# Altium PCB CAN Logger 3d HP3561 PCB.PcbDoc (part 3 of 3)
Units mil, origin at the board's own origin, x right, y up, seen from the top; angles counter-clockwise.
Board outline 2229 x 3254 mil, 4 copper layers (Component Side, Signal Layer 2, Signal Layer 1, Solder Side), stack 33.234 mil thick; 117 components, 131 nets, 581 pads, 372 vias.
Unrouted connection lines stored in the file: 2.
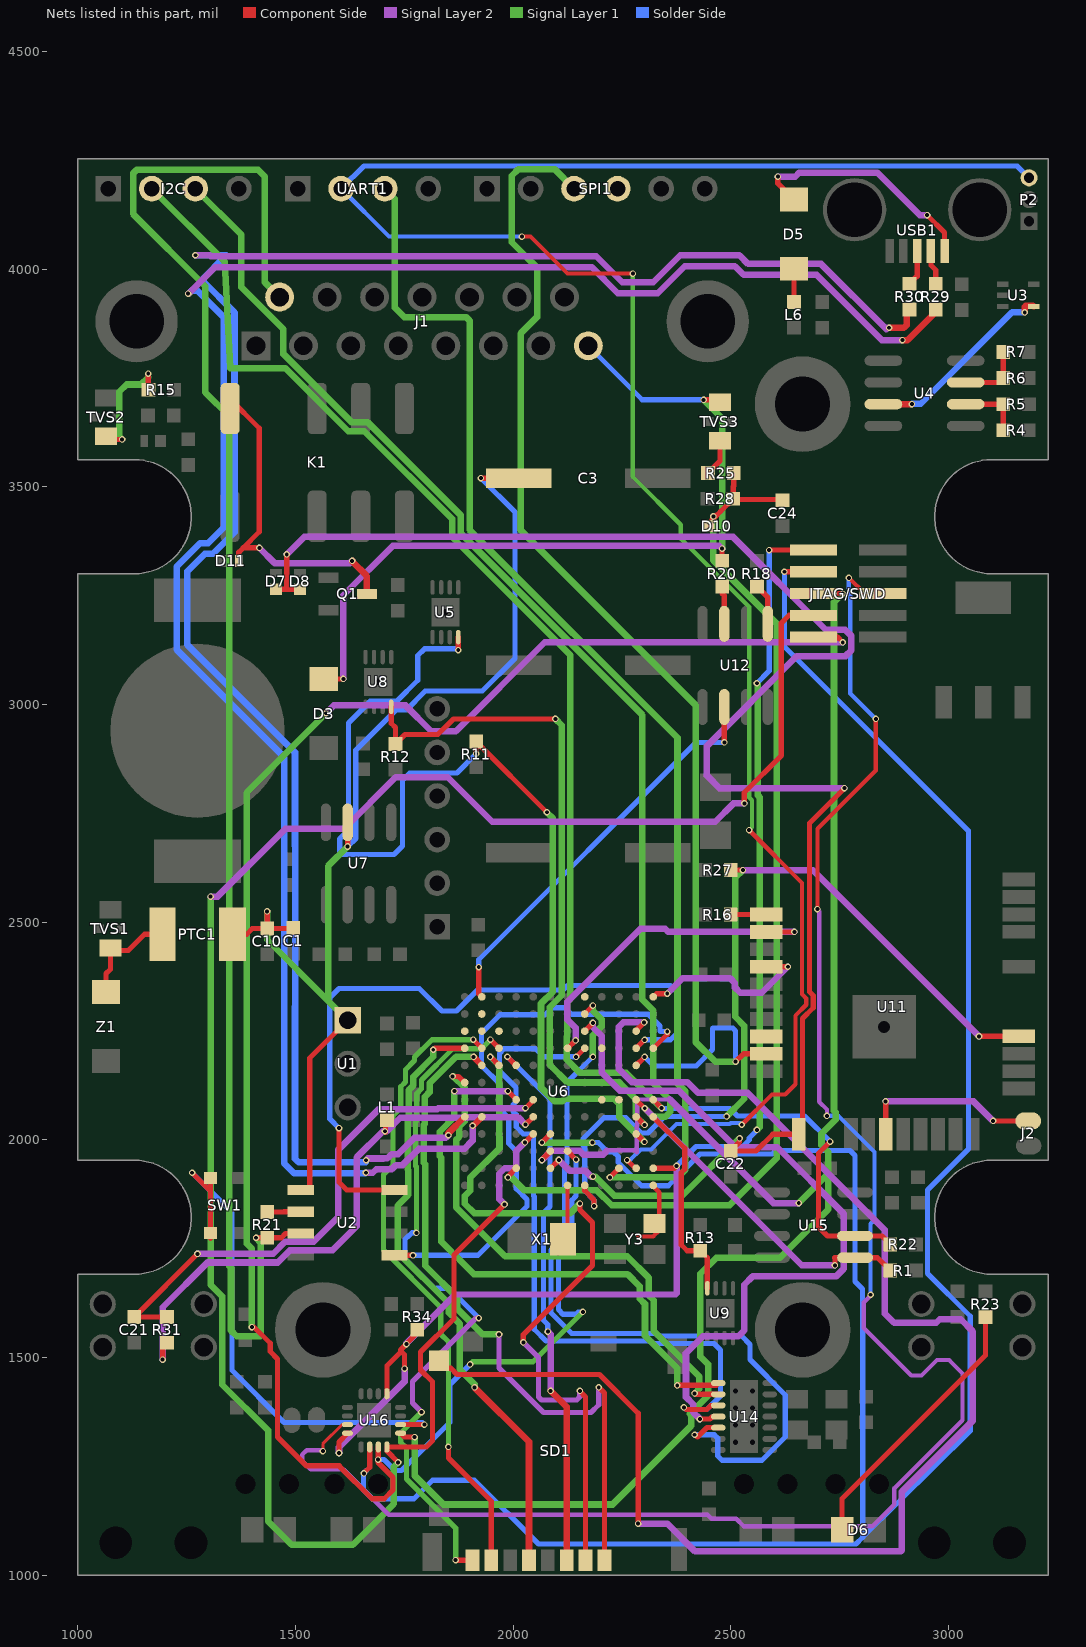
[diagram p5: the nets of this part, all layers, seen from the top]

## Via types
v1: diameter 15, hole 9, Component Side to Solder Side, 290 vias
v2: diameter 20, hole 10, Component Side to Solder Side, 66 vias
v3: diameter 20, hole 13, Component Side to Solder Side, 12 vias
v4: diameter 50, hole 28, Component Side to Solder Side, 4 vias

## Nets (pads, with @x,y where several pads share a name; then routed paths per layer and width w, separated by ;. In a path a pad name is that pad's centre, name@x,y a point inside that pad or via, vN(x,y) a via of type N, cw(c..) or ccw(c..) an arc to the next point about the centre after c; other vN are vias at no path point) (continued)
NetD5_1: D5.1 USB1.1 | length 553.8
  Component Side w12: v1(2608,4212.5) 2608,4197 D5.1@2645,4160 ; v1(2951,4124.01) 2990.98,4084.02 USB1.1@2990.98,4042
  Signal Layer 2 w15: v1(2608,4212.5) 2648,4212.5 2657.32,4221.82 2836.4,4221.82 2934.22,4124.01 v1(2951,4124.01)
NetD5_2: D5.2 L6.1 | length 76.5
  Component Side w12: L6.1@2645,3924.53 D5.2@2645,4001
NetD6_2: D6.2 R23.1 | length 624.9
  Component Side w12: D6.2@2755.6,1105 2755.6,1176 3085,1505.4 R23.1@3085,1593.47
NetD11_1: D11.1 K1.8 Q1.3 | length 797
  Component Side w12: K1.8@1350,3680 1350,3701.56 1417,3634.56 1417,3397 1380,3360 ; D11.1@1370,3330 1370,3350 1380,3360 ; v1(1417,3360) 1380,3360
  Component Side w15: v1(1630,3330) 1630,3329.44 1664.29,3295.15 Q1.3@1664.29,3254.1
  Signal Layer 2 w15: v1(1417,3360) 1452,3325 1625,3325 v1(1630,3330)
NetJ2_2: J2.2 U11.23 | length 422.2
  Component Side w12: v1(2855.38,2088.62) 2855.84,2088.16 U11.23@2855.84,2012.91 ; v1(3102.3,2043.7) J2.2@3183.03,2043.7
  Signal Layer 2 w15: v1(2855.38,2088.62) 3057.38,2088.62 v1(3102.3,2043.7)
NetJTAG/SWD_5: JTAG/SWD.5 U16.3 | length 4243.7
  Component Side w7: v1(1563,1285.25) 1563,1302.1 1607.09,1346.18 U16.3@1619.45,1346.18
  Component Side w10: v1(2699,2530) 2699,2714.74 2833,2848.74 v1(2833,2967) ; v1(2771,3291) 2771.52,3291 2807.52,3255 JTAG/SWD.5@2849.06,3255
  Signal Layer 2 w10: v1(1563,1285.25) 1560.75,1287.5 1525.75,1287.5 1515.5,1277.25 1515.5,1262.75 1534.75,1243.5 1609.83,1243.5 1714.33,1139 2446.47,1139 2455.47,1130 2512.57,1130 2530.07,1112.5 2825,1112.5 2875.5,1163 2875.5,1199.75 3032.14,1356.39 3032.14,1463.7 3001.3,1494.54 2973.54,1494.54 2938,1459 2914.5,1459 2805.5,1568 2805.5,1626.6 2820.85,1641.96 v1(2820.85,1644.5) ; v1(2699,2530) 2703.32,2525.68 2703.32,2087.38 2720.85,2069.85 v1(2720.85,2055.28)
  Solder Side w10: v1(2720.85,2055.28) 2747.04,2055.28 2830.07,1972.25 2830.07,1816.94 2820.85,1807.73 v1(2820.85,1644.5) ; v1(2771,3291) 2771,3265.75 2774.5,3262.25 2774.5,3025.5 v1(2833,2967)
NetPTC1_1: PTC1.1 TVS1.2 Z1.2 | length 234.7
  Component Side w12: Z1.2@1065,2340 1065,2382 1075,2392 1075,2435 1116,2435 1153.5,2472.5 PTC1.1@1195,2472.5
NetR4_2: R4.2 R5.1 U4.6 | length 146.7
  Component Side w12: U4.6@3039.49,3690 R5.1@3125.95,3690 3125.95,3659.47 3125.47,3659 R4.2@3125.47,3630
NetR6_1: R6.1 R7.1 U4.7 | length 150.1
  Component Side w12: U4.7@3039.49,3740 3115.47,3740 R6.1@3125.47,3750 R7.1@3125.47,3810
NetR15_1: R15.1 TVS2.2 | length 267.1
  Component Side w12: TVS2.2@1065,3610 1066,3609 v1(1102,3609) ; v1(1161.93,3760) 1161.93,3723.55 R15.1@1162.47,3723
  Signal Layer 1 w15: v1(1102,3609) 1095.5,3615.5 1095.5,3718.28 1112.36,3735.14 1145.14,3735.14 1162,3752
NetR16_1: R16.1 U11.10 | length 81.5
  Component Side w12: R16.1@2499.53,2517.79 U11.10@2581.04,2517.79
NetR18_2: R18.2 U12.1 | length 95.9
  Component Side w12: R18.2@2560,3270.97 2585,3245.97 U12.1@2585,3185.47
NetR20_2: R20.2 U12.3 | length 87.6
  Component Side w12: R20.2@2480,3270.97 2480,3254.81 2485,3249.81 U12.3@2485,3185.47
NetR21_1: R21.1 U2.6 | length 77.3
  Component Side w12: R21.1@1435,1834.53 1473,1834.53 1473.47,1835 U2.6@1512.13,1835
NetR25_1: R25.1 TVS3.2 | length 79.5
  Component Side w12: R25.1@2447.55,3531.85 2475,3559.3 TVS3.2@2475,3600
NetR29_2: R29.2 USB1.2 | length 80
  Component Side w12: USB1.2@2959.49,4042 2959.49,4009.06 2970.55,3998 R29.2@2970.55,3966.58
NetR30_2: R30.2 USB1.3 | length 82.6
  Component Side w12: R30.2@2910.55,3966.58 2927.99,3984.02 USB1.3@2927.99,4042
NetSPI1_4: SPI1.4 U11.17
NetU3_4: U3.4 U4.3 | length 446.6
  Component Side w15: U4.3@2850.51,3690 v1(2916,3690) ; v1(3175,3900.98) 3175,3913.82 3177.09,3915.91 3193.93,3915.91 U3.4@3195.43,3914.41
  Solder Side w15: v1(2916,3690) 2917,3691 2936,3691 3145.98,3900.98 v1(3175,3900.98)
NetU6_A8: U6.A8
NetU6_B2: U6.B2
NetU6_C1: U6.C1
NetU6_C2: U6.C2
NetU6_C3: U6.C3
NetU6_D9: U6.D9
NetU6_G9: U6.G9
NetU6_G10: U6.G10
nINT0: U6.F1 U14.9 | length 1238.5
  Component Side w12: v1(1861,2146) 1874.63,2146 U6.F1@1888.78,2131.85 ; v1(2417,1418) 2419.13,1415.87 U14.9@2471.26,1415.87
  Signal Layer 1 w15: v1(1861,2146) 1863.28,2146 1889,2120.28 1889,2043.37 1876,2030.37 1876,2006.99 1869,1999.99 1869,1845.43 1981.43,1733 2262,1733 2311,1684 2311,1643.53 2322.88,1631.65 2322.88,1561.12 2428,1456 2428,1429 v1(2417,1418)
nINT1: U6.G4 U14.8 | length 1367
  Component Side w12: v1(1988,2112) U6.G4@2006.14,2093.86 ; v1(2376.99,1436.5) 2424.66,1436.5 ; 2424.68,1436.48 2466.28,1436.48 U14.8@2471.26,1441.46
  Signal Layer 2 w15: v1(1865,2112) v1(1988,2112)
  Signal Layer 1 w15: v1(1865,2112) 1865,2052.56 1831.5,2019.06 1831.5,1963.15 1835,1959.65 1835,1766.72 1909.72,1692 2262.5,1692 2291,1663.5 2291,1635.25 2302.88,1623.37 2302.88,1550.14 2376.99,1476.03 v1(2376.99,1436.5)
OSC16: U6.M12 Y3.3 | length 163.2
  Component Side w10: 2287.16,1778.34 2321.49,1778.34 2335.67,1792.52 2335.67,1879.72 2321.85,1893.54 U6.M12@2321.85,1895.63
Program: SW1.1 SW1.2 U16.10 | length 1270.9
  Component Side w12: v1(1262.5,1924.61) 1305,1882.11 1305,1837 ; SW1.1@1305,1774.02 1305,1837 ; SW1.2@1305,1900 1305,1837 ; U16.10@1741.5,1346.18 v1(1796,1346.18)
  Solder Side w12: v1(1262.5,1924.61) 1354,1833.11 1354,1471 1474,1351 1791.18,1351 v1(1796,1346.18)
PTA0: JTAG/SWD.4 U6.J5 U16.8 | length 4874.3
  Component Side w12: v1(1736,1259.25) 1710,1285.25 U16.8@1710,1295 1800.5,1295 1814.5,1309 1814.5,1444.78 1787.45,1471.83 1787.45,1512.86 1864,1589.42 1864,1736.03 v1(1980.13,1852.16) ; v1(2027,1994.48) U6.J5@2046.26,2013.74 ; v1(2531,2773) 2531,2798 2616,2883 2616,3187.5 2633.5,3205 JTAG/SWD.4@2690,3205
  Signal Layer 2 w15: v1(1305,2559) 1321,2559 1477,2715 1612,2715 1730,2833 1850,2833 1952,2731 2464,2731 2506,2773 v1(2531,2773) ; v1(1980.13,1852.16) 1968,1864.28 1968,1922.28 1980.72,1935 2006,1935 2007,1936 2007,1974.48 v1(2027,1994.48)
  Signal Layer 1 w15: v1(1305,2559) 1305,1667.61 1332,1640.61 1332,1438 1437,1333 1437,1124 1491,1070 1632,1070 1726,1164 1726,1249.25 v1(1736,1259.25)
PTA1: JTAG/SWD.8 U6.J6 U16.6 | length 5713.9
  Component Side w12: v1(1657,1234) 1657,1234.74 1670.63,1248.37 U16.6@1670.63,1295 ; v1(2066,1994.11) U6.J6@2085.63,2013.74 ; v1(2623,3305) JTAG/SWD.8@2690,3305
  Signal Layer 1 w15: v1(2066,1994.11) 2181.89,1994.11 v1(2182,1994)
  Solder Side w12: 1662.5,1240.13 1656,1233.63 1656,1195.92 1675.92,1176 1772.46,1176 1814.96,1218.5 1911.5,1218.5 2058,1072 2787.5,1072 2803.09,1087.41 3050,1331.5 3050,1595 2952,1693 2952,1885 3046,1979 3046,2710 2623,3133 v1(2623,3305) ; v1(2182,1994) 2195.52,1994 2217.02,1972.5 2230.66,1972.5 2241.5,1961.66 2241.5,1948.02 2294.52,1895 2356.39,1895 2429.39,1968 2595.08,1968 2602.58,1975.5 2773.66,1975.5 2785,1964.16 2785,1675.19 2802.35,1657.84 2802.35,1621.81 2803,1621.16 2803,1087.5
PTA2: JTAG/SWD.6 U6.K6 U16.9 | length 4057.2
  Component Side w12: U16.9@1741.5,1326.5 1750.39,1317.6 v1(1773.5,1317.6) ; v1(2066,1953.63) 2066,1954.74 U6.K6@2085.63,1974.37 ; JTAG/SWD.6@2690,3255 v1(2757,3255)
  Signal Layer 2 w10: 2215.84,1976.35 2216.09,1976.61 2279.94,1976.61 2283.33,1980 ; 2283.6,1971.72 2284.88,2090.03 2282.48,2092.48 2360,2093
  Signal Layer 2 w15: v1(2066,1953.63) 2087.05,1974.68 2152.97,1974.68 2161.54,1966.11 2206.57,1966.11 2215.14,1974.68 ; 2360,2093 2598,1855 v1(2656,1855)
  Signal Layer 1 w15: v1(1773.5,1317.6) 1773.5,1229.22 1839.98,1162.74 2228.45,1162.74 2408.78,1343.06 2408.78,1367.38 2405.44,1370.72 2448,1413.28 2448,1484.5 2430,1502.5 2430,1692.68 2466.32,1729 2612.5,1729 2724,1840.5 2724,1923 ; v1(2656,1855) 2724,1923 ; v1(2757,3255) 2737,3235 2737,2067.42 2740.85,2063.57 2740.85,2047 2708.25,2014.39 2708.25,1987.96 2724,1972.21 2724,1923
PTA3: JTAG/SWD.2 U6.K7 U16.7 | length 4725.7
  Component Side w12: v1(1400,1570) 1405,1570 1442,1533 1442,1513.88 1459.03,1496.85 1459.03,1317.81 1525.34,1251.5 1600.42,1251.5 1675.92,1176 1704.08,1176 1724,1195.92 1724,1225 1690,1259 v1(1690,1266) ; v1@1690.31,1264.5 U16.7@1690.31,1295 ; U6.K7@2125,1974.37 v1(2144.69,1954.68) ; JTAG/SWD.2@2690,3155 2745,3155 v1(2757,3143)
  Signal Layer 2 w15: v1(1570,2980) 1588,2998 1753,2998 1812,2939 1868.5,2939 2072.5,3143 v1(2757,3143)
  Signal Layer 1 w12: v1(1901,1484.5) 1907,1490.5 2045.5,1490.5 v1(2160,1605)
  Signal Layer 1 w15: v1(1400,1570) 1400,1750 1388,1762 1388,2798 v1(1570,2980)
  Solder Side w12: v1(1690,1266) 1703.09,1266 1728.34,1240.75 1743.66,1240.75 1854.71,1351.8 1854.71,1438.21 v1(1901,1484.5) ; v1(2144.69,1954.68) 2144.69,1871.49 2134.85,1861.66 2134.85,1770.81 2104,1739.96 2104,1610.34 2114.84,1599.5 2144.5,1599.5 2149.43,1604.43 2159.43,1604.43 v1(2160,1605)
RAW: D3.1 J1.8 R20.1 TVS3.1 | length 1898.4
  Component Side w12: D3.1@1565,3059 v1(1610,3059) ; v1(2437.5,3700) TVS3.1@2475,3700 ; R20.1@2480,3330.03 v1(2480,3358.27)
  Signal Layer 2 w15: v1(1610,3059) 1610,3251 1724,3365 2473.27,3365 v1(2480,3358.27)
  Signal Layer 1 w15: v1(2437.5,3700) 2480,3657.5 v1(2480,3358.27)
  Solder Side w12: J1.8@2172.6,3824.09 2296.69,3700 v1(2437.5,3700)
RAW_Measured: C24.2 D10.2 R25.2 R28.1 U6.L4 | length 2526.7
  Component Side w12: v1@1990.28,1918.39 U6.L4@2006.89,1935 ; D10.2@2449.53,3410 2456.92,3424 2476.92,3444 ; v1(2460,3432) 2464.92,3432 2476.92,3444 ; R25.2@2506.6,3531.85 2506.6,3502.15 2505.45,3501 R28.1@2505.45,3472.53 ; C24.2@2618.79,3469.05 2617.06,3470.79 2507.19,3470.79 R28.1@2505.45,3472.53 ; 2476.92,3444 R28.1@2505.45,3472.53
  Signal Layer 1 w15: v1(1988,1914) 1996,1914 2026,1884 2192.28,1884 2226.28,1850 2497,1850 2605,1958 2605,3186 2460,3331 v1(2460,3432)
RAW_Sense: U6.A2 U12.6 | length 940.5
  Component Side w12: v1(1921,2396.96) 1921,2335.85 U6.A2@1928.15,2328.7 ; v1(2485,2913) U12.6@2485,2994.53
  Solder Side w12: v1(1921,2396.96) 1921,2414 2420,2913 v1(2485,2913)
RESET_B: JTAG/SWD.10 R34.2 U6.L12 U16.4 U16.13 | length 3220.7
  Component Side w12: v1(1600,1281) 1600,1306.5 1620,1326.5 U16.4@1619.45,1326.5 ; U16.13@1710,1417.05 1710,1481.29 1741.21,1512.5 1741.21,1515.95 1750.57,1506.58 v1(1750.57,1475) ; 1741.21,1517.21 v1(1755,1531) 1755,1531.81 1779.75,1556.56 R34.2@1779.75,1564 ; U6.L12@2321.85,1935 2370.23,1935 v1(2375.6,1940.37) ; v1(2588,3355) JTAG/SWD.10@2690,3355
  Signal Layer 2 w15: v1(1600,1281) 1600,1294.51 1750.57,1445.08 v1(1750.57,1475) ; v1(1755,1531) 1755,1533 1866.5,1644.5 2373,1645.5 2375.6,1648.1 v1(2375.6,1940.37)
  Signal Layer 1 w15: v1(2560,2023) 2566,2029 2566,2787.5 2562.08,2791.42 2562.08,3046.92 v1(2560,3049)
  Solder Side w12: v1(2375.6,1940.37) 2420.23,1985 2527.66,1985 2542.46,1999.79 2542.46,2004.64 2560,2022.19 v1(2560,2023) ; v1(2560,3049) 2588,3077 v1(2588,3355)
RX1: P2.3 U6.L11 UART1.2 | length 4896.8
  Component Side w10: v1(2020,4075) 2040,4075 2125,3990 v1(2275,3990) ; v1(2262,1953.68) 2262,1953.39 2280.39,1935 U6.L11@2282.48,1935 ; v1(2525,2035) 2594.53,2104.53 2625.14,2104.53 2648.5,2127.89 2648.5,2285.59 2673.34,2310.43 2673.34,2324.93 2663.32,2334.95 2663.32,2590.26 v1(2542.08,2711.5)
  Signal Layer 1 w10: v1(2275,3990) 2275,3523 2385,3413 2385,3381.25 2542.08,3224.17 2542.08,2786.67 2548.5,2780.25 2548.5,2717.92 v1(2542.08,2711.5)
  Solder Side w10: UART1.2@1605,4185 1715,4075 v1(2020,4075) ; v1(2262,1953.68) 2268.68,1953.68 2292.99,1977.99 2316.85,1977.99 2375.37,2036.5 2497.5,2036.5 2500,2039 2521,2039 v1(2525,2035)
  Solder Side w12: UART1.2@1605,4185 1657.32,4237.32 3157.68,4237.32 P2.3@3185,4210
"Safe 12V": C1.2 C3.1 C10.1 PTC1.2 U1.1 U2.5 U7.7 | length 2602.3
  Component Side w12: PTC1.2@1355,2472.5 1388,2472.5 1400.95,2485.45 C10.1@1435,2485.45 ; v1(1435,2525) C10.1@1435,2485.45 ; C1.2@1495,2486.6 1493.85,2485.45 C10.1@1435,2485.45 ; U2.5@1512.13,1885 1533,1885 1533,2188 U1.1@1620,2275 ; v1(1620,2674) U7.7@1620,2729.49 ; v1(1926,3520) C3.1@2013.15,3520
  Signal Layer 1 w15: v1(1435,2525) 1435,2460 1575,2320 ; U1.1@1620,2275 1575,2320 ; v1(1620,2674) 1575,2629 1575,2320
  Solder Side w12: v1(1620,2674) 1638.75,2692.75 1638.75,2895.6 1730.93,2987.78 1754.78,2987.78 1798,3031 1929,3031 2004,3106 2004,3442 v1(1926,3520)
SCK: U6.D8 U14.10 | length 1638.1
  Component Side w12: v1(2144.78,2191) U6.D8@2164.37,2210.59 ; v1(2392.36,1385.93) 2397.44,1380.85 2444.85,1380.85 2454.28,1390.28 U14.10@2471.26,1390.28
  Solder Side w12: v1(2144.78,2191) 2070,2191 2051.39,2209.61 1979.34,2209.61 1968.5,2198.77 1968.5,2158.5 2006.5,2120.5 2006.5,2087.66 1999.5,2080.66 1999.5,2065.34 2007,2057.84 2007,2030.34 2023.34,2014 2045.75,2014 2046.75,2013 2046.75,1872.1 2048.65,1870.2 2048.65,1565.19 2075.34,1538.5 2316.79,1538.5 2322.79,1532.5 2461.06,1532.5 2476,1517.56 2476,1412 2444.85,1380.85 2397.44,1380.85 v1(2392.36,1385.93)
SCK1: SPI1.3 U6.E11 U11.18 | length 2934.8
  Component Side w12: U6.E11@2282.48,2171.22 v1(2302.13,2190.87) ; v1(2511,2180) 2528.79,2197.79 U11.18@2581.04,2197.79
  Signal Layer 1 w15: SPI1.3@2140,4185 2095,4230 2012.5,4230 1997,4214.5 1997,4062 2055,4004 2055,3890 2017,3852 2017,3400.78 2419,2998.78 2419,2225 2464,2180 v1(2511,2180)
  Solder Side w12: v1(2302.13,2190.87) 2323,2170 2420.5,2170 2458,2207.5 2458,2256 2459,2257 2504.5,2257 2511,2250.5 v1(2511,2180)
SCL0: I2C.2 R22.2 U6.G12 U15.6 | length 3592.2
  Component Side w12: U6.G12@2321.85,2092.48 2341,2073.33 v1(2341,2073) ; v1(2728.25,1996.25) 2701.5,1969.5 2701.5,1800 2721.97,1779.53 U15.6@2785.39,1779.53 2846.95,1779.53 R22.2@2866.47,1760
  Signal Layer 1 w15: I2C.2@1170,4185 1337.5,4017.5 1350,3773 1476.35,3773 1621.35,3628 1658.28,3628 1860,3426.28 1860,3384.53 2131.5,3113.03 2131.5,2324.11 2124.69,2317.3 2124.69,2276.32 ; v1(2341,2073) 2260,2154 2153.5,2154 2123.49,2184 2123.49,2236.78 2124.72,2238.01 2124.72,2276.28 ; 2124.69,2276.32 2124.72,2276.28
  Solder Side w12: v1(2341,2073) 2341.5,2072.5 2498,2072.5 2515.5,2055 2669.49,2055 v1(2728.25,1996.25)
"SD CLK": SD1.5 U6.D1 | length 1406.3
  Component Side w12: v1(1816.5,2207.28) 1817.31,2207.28 1820.62,2210.59 U6.D1@1888.78,2210.59
  Component Side w15: v1(1911.41,1431.66) 2036.45,1306.62 SD1.5@2036.45,1034.8
  Signal Layer 1 w15: v1(1816.5,2207.28) 1816.5,2190.92 1771,2145.42 1771,2125.23 1760.31,2114.54 1760.31,2052.52 1757.5,2049.71 1757.5,1932.5 1759.36,1930.64 1759.36,1873.72 1735,1849.36 1735,1741.72 1852,1624.72 1852,1603.32 1877,1578.32 1877,1473.29 1911.41,1438.88 v1(1911.41,1431.66)
"SD CMD": SD1.3 U6.E4 | length 1253.6
  Component Side w12: v1(1987,2191.11) U6.E4@2006.89,2171.22 ; v1@2079.43,1559.43 v1(2080,1560)
  Component Side w15: v1(2086,1423.74) 2123.06,1386.68 SD1.3@2123.06,1034.8
  Signal Layer 2 w15: v1(2080,1560) 2086,1554 v1(2086,1423.74)
  Solder Side w12: v1(1987,2191.11) 2084.5,2093.61 2084.5,1846.96 2070,1832.46 2070,1585.81 2079.43,1576.39 2079.43,1560.57 v1(2080,1560)
"SD Contact": SD1.DT U6.C11 | length 3332.4
  Component Side w12: SD1.DT@1830.15,1492.68 1846.98,1475.84 1856.61,1475.84 1870.96,1461.5 2198.12,1461.5 2287.16,1372.46 v1(2287.16,1119) ; U6.C11@2282.48,2249.96 2282.48,2251.48 v1(2301,2270)
  Signal Layer 2 w15: v1(2287.16,1119) 2354,1119 2418,1055 2890,1055 2893,1058 2893,1192.5 3056,1355.5 3056,1560 3028,1588 2980,1588 2972,1580 2875,1580 2853.75,1601.25 2853.75,1793.25 2539,2108 2425,2108 2400,2133 2272.5,2133 2243,2162.5 2243,2260 2253,2270 v1(2301,2270)
"SD DAT0": SD1.7 U6.D2 | length 1466.8
  Component Side w12: v1(1851.5,1295) 1851.5,1269.24 1949.83,1170.9 SD1.7@1949.83,1034.8 ; v1(1908.46,2230.28) U6.D2@1928.15,2210.59
  Signal Layer 1 w12: v1(1851.5,1295) 1851.5,1536.5 1833.5,1554.5 1833.5,1615.95 1702.5,1746.95 1702.5,1920.66 1723.91,1942.07 1723.91,2055.54 1741.81,2073.44 1741.81,2122.21 1752.5,2132.89 1752.5,2161.26 1773.53,2182.28 1773.53,2190.47 1813.33,2230.28 v1(1908.46,2230.28)
"SD DAT1": SD1.8 U6.D3 | length 1628.3
  Component Side w12: v1(1868,1035) 1870.61,1035 1870.8,1034.8 SD1.8@1906.52,1034.8 ; v1(1947.83,2230.28) U6.D3@1967.52,2210.59
  Signal Layer 2 w12: v1(1789.5,1375) 1768.95,1395.55 1768.95,1436.94 1769.07,1437.07 1769.07,1445.08 1914.88,1590.89 v1(1921,1590.89) v1@1921.57,1591.46
  Signal Layer 1 w12: v1(1778,1786.43) 1777.86,1786.57 1777.86,1938.3 1776,1940.16 1776,2042.05 1778.81,2044.86 1778.81,2106.88 1789.5,2117.57 1789.5,2137.76 1861.24,2209.5 1927.06,2209.5 v1(1947.83,2230.28) ; v1(1789.5,1375) 1741.81,1327.31 1741.81,1305.63 1755,1292.44 1755,1221.55 1868,1108.55 v1(1868,1035)
  Solder Side w12: 1767.47,1787.01 1759.46,1779 1758.53,1779 1751.5,1771.97 1751.5,1727.34 1819.44,1659.4 1852.49,1659.4 v1(1921,1590.89) ; 1767.48,1787 1777.43,1787 v1(1778,1786.43)
SD_DAT3: SD1.2 U6.E3 | length 1734.8
  Component Side w12: v1(1947.52,2191) 1947.74,2191 U6.E3@1967.52,2171.22 ; v1(2023.43,1534.87) 2023.43,1552.93 2182,1711.5 2182,1810.53 2153.35,1839.17 v1(2153.35,1854) ; v1(2153.35,1423.74) 2153.35,1422.93 2166.37,1409.92 SD1.2@2166.37,1034.8
  Signal Layer 2 w12: v1(2023.43,1534.87) 2058.28,1500.02 2058.28,1409.74 2065.31,1402.71 2145.94,1402.71 2152.78,1409.55 2152.78,1423.17 v1(2153.35,1423.74)
  Signal Layer 1 w15: v1(1947.52,2191) 1968,2170.52 1968,2006.97 1968.66,2006.31 1968.66,1980.66 1901,1913 1901,1883.28 1889,1871.28 1889,1853.72 1910.56,1832.16 2131.51,1832.16 v1(2153.35,1854)
SD_DATA2: SD1.1 U6.E2 | length 1627.7
  Component Side w12: v1(2196.66,1431.66) 2196.91,1431.66 2209.67,1418.9 SD1.1@2209.67,1034.8
  Component Side w15: v1(1909,2191) 1928.15,2171.85 U6.E2@1928.15,2171.22
  Signal Layer 2 w12: v1(1967.52,1553.45) 1967.52,1476.46 2069.7,1374.29 2179.11,1374.29 2196.66,1391.84 v1(2196.66,1431.66)
  Signal Layer 1 w15: v1(1909,2191) 1868.9,2191 1808,2130.1 1808,2109.91 1797.31,2099.22 1797.31,2037.19 1794.5,2034.38 1794.5,1947.82 1798,1944.32 1798,1710.89 1872,1636.89 1872,1611.6 1930.15,1553.45 v1(1967.52,1553.45)
SDA0: I2C.3 R1.2 U6.G11 U15.5 | length 3438.5
  Component Side w12: U6.G11@2282.48,2092.48 2282.58,2092.48 2302.17,2072.88 v1(2302.27,2072.88) ; v1(2739,1712) 2739,1728.53 2738,1729.53 U15.5@2785.39,1729.53 2836.95,1729.53 R1.2@2866.47,1700
  Signal Layer 2 w15: v1(2302.27,2072.88) 2302.27,2072.69 2662.96,1712 v1(2739,1712)
  Signal Layer 1 w15: I2C.3@1270,4185 1376,4079 1376,3958.5 1472.5,3862 1472.5,3805.14 1629.64,3648 1666.57,3648 1880,3434.57 1880,3392.82 2297,2975.82 2297,2322 2322.13,2296.87 2322.13,2130.15 2361,2091.28 2361,2064.72 2349.28,2053 2322.06,2053 v1@2302.22,2072.83
SDI: U6.C8 U14.11 | length 1678.5
  Component Side w12: U6.C8@2164.37,2249.96 v1@2183.11,2268.74 ; v1(2429,1359) 2452.31,1359 2458,1364.69 U14.11@2471.26,1364.69
  Signal Layer 2 w15: v1(2183.11,2268.78) 2183.11,2259.14 2203,2239.24 2203,2155.34 2245.34,2113 2381,2113 2510.5,1983.5 2606.5,1983.5 2759,1831 2759,1703.72 2741.78,1686.5 2550,1686.5 2531,1667.5 2531,1562.5 2517.5,1549 2436,1549 2397,1510 2397,1409.57 2413.71,1392.86 2413.71,1374.29 v1(2429,1359)
SDO: U6.B8 U14.12 | length 1865.8
  Component Side w12: U6.B8@2164.37,2289.33 2164.37,2289.75 v1(2183,2308.38) ; v1(2417,1323) 2418.34,1323 2423.73,1317.6 2445.56,1339.44 2470.92,1339.44 U14.12@2471.26,1339.1
  Signal Layer 1 w15: v1(2183,2191) 2183,2240.39 2203.11,2260.5 2203.11,2277.06 2183,2297.17 v1(2183,2308.38)
  Solder Side w12: v1(2183,2191) 2124,2132 2124,1946.84 2117.85,1940.69 2117.85,1777.85 2087,1747 2087,1603.3 2134.8,1555.5 2326.9,1555.5 2332.9,1549.5 2525,1549.5 2544,1530.5 2544,1495.45 2625,1414.45 2625,1317.62 2571.88,1264.5 2479.55,1264.5 2469.87,1274.18 2469.87,1315.13 2467.4,1317.6 2462,1323 v1(2417,1323)
"Silent 0": R11.1 U5.8 U6.J11 | length 2440.8
  Component Side w12: v1(1874,3125) 1874.06,3125.06 U5.8@1874.06,3155 ; v1(1915,2887) R11.1@1915,2915 v1(2077.33,2752.67) ; U6.J11@2282.48,2013.74 2283.19,2013.74 v1(2301.44,1995.49)
  Signal Layer 1 w15: v1(2077.33,2752.67) 2091.5,2738.5 2091.5,2340.68 2064,2313.18 2064,2120.26 2095.84,2088.42 2112.41,2088.42 2118.99,2095 2231.71,2095 2243.43,2083.28 2243.43,2053.5 v1(2301.44,1995.49)
  Solder Side w12: v1(1874,3125) 1871,3128 1796.5,3128 1781,3112.5 1781,3056 1733,3008 1672,3008 1621.75,2957.75 1621.75,2711.25 1601.5,2691 1601.5,2657 1603,2655.5 1726.5,2655.5 1746,2675 1746,2826.5 1762.5,2843 1871,2843 v1(1915,2887)
"Silent 1": R12.1 U6.H11 U8.8 | length 1619.7
  Component Side w12: U8.8@1720,2995 1720,2957 1730,2947 R12.1@1730,2909.53 1751.47,2931 1827,2931 1863,2967 v1(2097,2967) ; U6.H11@2282.48,2053.11 U6.H11@2282.95,2053.58 ; U6.H11@2284.65,2055.28 U6.H11@2282.95,2053.58 ; v1(2301.86,2034.67) U6.H11@2282.95,2053.58
  Signal Layer 1 w15: v1(2097,2967) 2111.5,2952.5 2111.5,2332.4 2084,2304.9 2084,2172.88 2124.88,2132 2243.47,2132 2282.22,2093.25 2282.22,2054.31 v1(2301.86,2034.67)
"Silent 2": R13.1 U6.H12 U9.8 | length 469.6
  Component Side w12: U6.H12@2321.85,2053.11 2394.1,1980.86 2394.1,1932.71 2386,1924.61 2386,1759.47 2400,1745.47 R13.1@2430,1745.47 2445.94,1729.53 U9.8@2445.94,1659.17
SWCAN: J1.9 R21.2 U2.7 | length 3766.7
  Component Side w12: U2.7@1512.13,1785 1477.53,1785 1468,1775.47 R21.2@1435,1775.47 v1@1410.51,1775.47 ; v1@1410.51,1775.47 1409.79,1774.74 1409.06,1775.47 v1(1409.79,1775.47) v1@1410.51,1775.47
  Signal Layer 1 w15: v1(1409.79,1775.47) 1409.79,1774.74 1420,1764.53 1420,1550.07 1419,1549.07 1365.43,1549.07 1352,1562.5 1352,1706 1348,1710 1348,3662 1293,3717 1293,3961 1127,4127 1127,4220 1135,4228 1414.5,4228 1430,4212.5 1430,3969.65 J1.9@1463.74,3935.91
SWCANRX: U2.4 U6.D11 | length 1628.5
  Component Side w12: v1(1600,2027) 1600,1903 1618,1885 U2.4@1727.87,1885 ; U6.D11@2282.48,2210.59 v1(2301.89,2230)
  Solder Side w12: v1(1600,2027) 1579,2048 1579,2327 1600,2348 1784.5,2348 1836.5,2296 1869.84,2296 1918.29,2344.46 2114.58,2344.46 2124.62,2354.5 2361.66,2354.5 2376.03,2340.13 2376.03,2244.87 2361.16,2230 v1(2301.89,2230)
SWCANTX: U2.1 U6.D12 | length 1322.7
  Component Side w12: U2.1@1727.87,1735 v1(1770,1735) ; U6.D12@2321.85,2210.59 2354,2242.74 v1(2354,2249)
  Solder Side w12: v1(1770,1735) 1918.81,1735 2031.65,1847.84 2031.65,1863.16 2007,1887.81 2007,1975 1990,1992 1990,2050.8 1969.5,2071.3 1969.5,2128.5 1927.5,2170.5 1927.5,2245.23 1969.77,2287.5 2073.3,2287.5 2089.3,2303.5 2119.43,2303.5 2134.43,2288.5 2310.5,2288.5 2337.5,2261.5 2337.5,2250 2338.5,2249 v1(2354,2249)
TX1: U6.L10 UART1.3 | length 2833.1
  Component Side w12: v1(2222,1913.89) U6.L10@2243.11,1935
  Signal Layer 1 w15: UART1.3@1705,4185 1728,4162 1728,3912 1750,3890 1892,3890 1900,3882 1900,3401.1 2377.53,2923.57 2377.53,2129.47 2395.6,2111.4 2395.6,1932.09 2377.4,1913.89 v1(2222,1913.89)
"USB D_N": R29.1 U6.H2 | length 4645.4
  Component Side w15: v1(1906.93,2032.6) 1908.37,2032.6 1928.15,2052.37 U6.H2@1928.15,2053.11 ; v1(2894,3837) 2905.57,3837 2970.55,3901.98 R29.1@2970.55,3907.53
  Signal Layer 2 w15: v1(1253.5,3944) 1255,3944 1316,4005 2180.46,4005 2240.46,3945 2332.22,3945 2394.21,4006.99 2509.37,4006.99 2529.37,3986.99 2697.01,3986.99 2847,3837 v1(2894,3837) ; v1(1661.79,1924.61) 1677.8,1924.61 1685.6,1932.4 1712.12,1932.4 1712.72,1933 1721.72,1933 1731.07,1942.35 1746.07,1942.35 1783.72,1980 1888.4,1980 1906.93,1998.53 v1(1906.93,2032.6)
  Solder Side w15: v1(1253.5,3944) 1255,3944 1261.86,3950.86 1274.29,3950.86 1335,3890.14 1335,3406 1299.91,3370.91 1281.27,3370.91 1227,3316.64 1227,3126.64 1474,2879.64 1474,2693.28 1474.5,2692.78 1474.5,2316.37 1474,2315.87 1474,1946.45 1497.43,1923.02 1660.2,1923.02 v1(1661.79,1924.61)
"USB D_P": R30.1 U6.H1 | length 4598.7
  Component Side w15: v1(1851.5,2010.77) 1851.5,2015.83 U6.H1@1888.78,2053.11 ; v1(2863.5,3865.47) 2897.47,3865.47 2902.79,3870.79 2904,3870.79 2904,3900.98 R30.1@2910.55,3907.53
  Signal Layer 2 w15: v1(1270,4032) 1303.64,4032 1305.64,4030 2190.82,4030 2250.82,3970 2321.87,3970 2383.86,4031.99 2519.73,4031.99 2539.73,4011.99 2707.37,4011.99 2857.36,3862 2860.83,3865.47 v1(2863.5,3865.47) ; v1(1662.5,1953.39) 1666.51,1957.4 1701.76,1957.4 1702.36,1958 1711.37,1958 1720.72,1967.35 1735.71,1967.35 1773.36,2005 1845.73,2005 v1(1851.5,2010.77)
  Solder Side w15: v1(1270,4032) 1340.78,4032 1284.64,3975.86 1360,3900.5 1360,3395.64 1310.26,3345.91 1291.62,3345.91 1252,3306.28 1252,3137 1499,2890 1499,2675.53 ; 1499.5,2680.03 1499.5,2306.01 1499,2305.51 1499,1956.81 1507.15,1948.65 v1@1661.82,1948.65
VBat: C22.2 D7.2 D8.2 U6.L6 U11.20 | length 3980.8
  Component Side w12: D7.2@1455,3265 1480,3265 ; v1(1480,3345) 1480,3265 ; D8.2@1510,3265 1480,3265 ; U6.L6@2085.63,1935 2086,1935 v1(2105,1954) ; v1(2520,2003.5) 2520,1995 C22.2@2499.52,1974.53 2558,1974.53 2596.39,2012.91 U11.20@2655.84,2012.91 2664.5,2021.57 2664.5,2278.96 2689.34,2303.81 2689.34,2331.56 2680.5,2340.4 2680.5,2727.5 v1(2761,2808)
  Signal Layer 2 w15: v1(1480,3345) 1520,3385 2505.27,3385 2718.27,3172 2762.5,3172 2777,3157.5 2777,3125 2763.5,3111.5 2651.5,3111.5 2445,2905 2445,2837 2474,2808 v1(2761,2808) ; v1(2105,1954) 2130,1929 2166,1929 2179.11,1915.89 v1(2183,1915.89)
  Signal Layer 1 w15: v1(2183,1915.89) 2188.68,1915.89 2232.57,1872 2388.5,1872 v1(2520,2003.5)
VDDA: L1.1 R31.1 U6.H5 | length 1332.7
  Component Side w12: v1(1195,1495.46) 1195,1524.47 R31.1@1205,1534.47 ; v1@1706.71,2017 1706.71,2041.71 L1.1@1710.47,2045.47 ; v1(2028.33,2035.18) U6.H5@2046.26,2053.11
  Signal Layer 2 w15: v1(1195,1495.46) 1195,1615.5 1298.03,1718.53 1459.43,1718.53 1487.41,1746.5 1585.28,1746.5 1640.5,1801.72 1640.5,1959.68 1700.82,2020 v1(1705.41,2020) 1710,2020 1740.93,2050.93 1894.33,2050.93 1896,2052.6 2010.91,2052.6 v1(2028.33,2035.18)
VREFH: C21.2 R31.2 U6.G5 | length 1289.2
  Component Side w12: R31.2@1205,1593.53 C21.2@1130,1593.53 v1(1275,1738.53) ; v1(2028.33,2073) 2046.26,2090.93 U6.G5@2046.26,2092.48
  Signal Layer 2 w15: v1(1275,1738.53) 1448.86,1738.53 1476.84,1766.5 1541.78,1766.5 1598,1822.72 1598,1976.99 1691.94,2070.93 1825.6,2070.93 1827.66,2073 v1(2028.33,2073)
WAKE: U6.D7 U11.11 | length 780.9
  Component Side w12: U6.D7@2125,2210.59 2125.59,2210.59 v1(2143.49,2228.49) ; U11.11@2581.04,2477.79 2645.76,2477.79 v1(2645.82,2477.85)
  Signal Layer 2 w15: v1(2143.49,2228.49) 2143.49,2257.52 2124.69,2276.32 2124.69,2317.3 2292.39,2485 2349.28,2485 2356.43,2477.85 v1(2645.82,2477.85)
"WIFI IRQ": U6.A12 U11.13 | length 421.5
  Component Side w12: U6.A12@2321.85,2328.7 2329.15,2336 v1(2354,2336) ; U11.13@2581.04,2397.79 v1(2631,2397.79)
  Signal Layer 2 w15: v1(2354,2336) 2389.75,2371.75 2497.81,2371.75 2509.53,2360.04 2509.53,2350.19 2521.72,2338 2571.21,2338 v1(2631,2397.79)
WiFi_RESET: R27.1 U6.M8 U11.4 | length 2020.4
  Component Side w12: U6.M8@2164.37,1895.63 2164.37,1883.6 2186,1861.97 v1(2186,1848) ; R27.1@2499.53,2620 v1(2527.77,2620) ; v1(3070,2238.03) U11.4@3160.96,2238.03
  Signal Layer 2 w15: v1(2527.77,2620) 2688.03,2620 v1(3070,2238.03)
  Signal Layer 1 w15: v1(2490.25,2054) 2531,2094.75 2531,2262 2510,2283 2510,2602.23 v1(2527.77,2620)
  Solder Side w12: v1(2186,1848) 2186,1862 2164.5,1883.5 2164.5,1983.34 2160.5,1987.34 2160.5,2002.66 2208.94,2051.1 2259.27,2051.1 2294.2,2016.17 2309.52,2016.17 2347.35,2054 v1(2490.25,2054)
XTAL32: U6.M7 X1.1 | length 165.1
  Component Side w10: X1.1@2102.24,1740 2125,1762.76 U6.M7@2125,1895.63
pads on no net: JTAG/SWD.7 LP1. LP2. LP3. LP4. P3.2 P3.3 P3.6 SW20. SW21. U3.1 U6.A6 U6.A7 U6.A10 U6.B3 U6.B5 U6.B6 U6.B10 U6.C5 U6.C6 U6.C10 U6.D5 U6.D6 U6.E1 U6.F2 U6.F3 U6.F4 U6.F9 U6.F10 U6.F11 U6.F12 U6.G2 U6.G3 U6.H4 U6.J1 U6.J2 U6.J3 U6.J4 U6.J7 U6.J8 U6.J10 U6.J12 U6.K1 U6.K3 U6.K8 U6.K12 U6.L1 U6.L2 U6.L5 U6.L7 U6.L8 U6.L9 U6.M1 U6.M2 U6.M5 U6.M9 U7.8 U11.1 U11.2 U11.3 U11.5 U11.6 U11.7 U11.8 U11.21 U11.25 U11.26 U11.27 U14. U15.1 U15.2 U15.3 U15.7 U16.5 U16.11 U16.12 U16.14 U16.15 U16.16 USB1.0 USB1.5
copper on no net: | length 2563.3
  Component Side w12: 2203.74,2171.22 2221.52,2189 v1(2223,2189) ; v1(2480,2237.79) 2581.04,2237.79
  Signal Layer 1 w15: 2240,4185 2240,3501.5 2505,3236.5 2505,2877.37 2460,2832.37 2460,2257.79 v1(2480,2237.79)
  Solder Side w12: v1(2223,2189) 2223,2182.48 2222.26,2181.74 2251,2153 2462.5,2153 2480,2170.5 v1(2480,2237.79)

## Polygon pours and split planes (outlines as drawn)
GND on Solder Side "GND_L04_P006" (solid, pour order 6): 1000,1000 1000,1691.5 1130,1691.5 ccw(c1130,1822.5) 1130,1953.5 1000,1953.5 1000,3300.5 1130,3300.5 ccw(c1130,3431.5) 1130,3562.5 1000,3562.5 1000,4254 3229,4254 3229,3562.5 3099,3562.5 ccw(c3099,3431.5) 3099,3300.5 3229,3300.5 3229,1953.5 3099,1953.5 ccw(c3099,1822.5) 3099,1691.5 3229,1691.5 3229,1000
GND on Component Side "GND_L01_P005" (solid, pour order 5): 1000,1000 1000,1691.5 1130,1691.5 ccw(c1130,1822.5) 1130,1953.5 1000,1953.5 1000,3300.5 1130,3300.5 ccw(c1130,3431.5) 1130,3562.5 1000,3562.5 1000,4254 3229,4254 3229,3562.5 3099,3562.5 ccw(c3099,3431.5) 3099,3300.5 3229,3300.5 3229,1953.5 3099,1953.5 ccw(c3099,1822.5) 3099,1691.5 3229,1691.5 3229,1000

## Keep-outs
Keep-Out Layer:
  the board outline again, w10

## Other copper
Component Side:
  rectangle net 3V3: 2940,3050 3220,3290
Signal Layer 2:
  rectangle net GND: 2495,1270 2891,1445
  rectangle net GND: 2070,1822.5 2139.9,1915
  rectangle net GND: 1941.39,1700 2360,1835
  rectangle net GND: 2262.52,1702 2357.52,1934
Solder Side:
  rectangle net GND: 2487.22,1285.88 2569.4,1452.23
  rectangle net 3V3: 3057,2270 3220.53,3119
  rectangle net GND: 2715,2120 3035,2590
  rectangle net 3V3: 2790,3050 3220.53,3555

## Silkscreen, mask and mechanical layers (free items; w line width, h text height)
Top Overlay:
  text "TX" at 1885.9,2768.12 h25
Bottom Overlay:
  text "SDA" at 1191,4122 h30 r90
  text "SCL" at 1270,4122 h30 r90
  text "J1708-" at 2020,4122 h25 r90
  text "J1708+" at 2131,4122 h25 r90
  text "Gnd" at 1079.94,4119 h30 r90
  text "SWCAN" at 1480,4101.17 h25 r90
  text "CAN0L" at 1805,4101.17 h25 r90
  text "CAN0H" at 1915,4101.17 h25 r90
  text "CAN1L" at 1586,4097.01 h25 r90
  text "A7" at 1691.79,4034.53 h30 r90
  text "15" at 2218,3921 h30
  text "9" at 1412,3918 h30
  text "8" at 2239,3816 h30
  text "1" at 1357,3812 h30
  text "A6" at 1421.94,3773 h30 r90
  text "LIN" at 1528.21,3773 h30 r90
  text "CAN2H" at 1639.94,3773 h30 r90
  text "CAN2L" at 1746.32,3773 h30 r90
  text "CAN1H" at 1854.47,3773 h30 r90
  text "Gnd" at 1968.94,3773 h30 r90
  text "Gnd" at 2078,3773 h30 r90
  text "Vin" at 2193,3773 h30 r90
  text "NMFTA CAN Logger  / Revision 3d, February 2020 / J. Daily, Colo. State Univ. / Fits BUD HP-3651-B Enclosure" at 1376,3053 h40 r90
Mechanical 1:
  text "Dots are anodes / Bars are Cathodes" at 1299.25,845 h40

## Dimensions
2665,1564 to 3229,1000 on Mechanical 1
1000,1000 to 3229,1000 on Mechanical 1
1000,1000 to 1000,4254 on Mechanical 1

## Text inside footprints (layer, text, board x,y; h text height)
C2: Top Overlay "+" at 2009.02,3050 h60 r180
C3: Top Overlay "+" at 2005,3475 h60 r180
C28: Top Overlay "+" at 2005,2625 h60 r180
J1: Top Overlay "1" at 1375,3870 h30; Top Overlay "8" at 2165,3870 h30; Top Overlay "15" at 2095,3985 h30; Top Overlay "9" at 1475,3985 h30
K1: Top Overlay "COIL" at 1365.75,3504.8 h30 r90; Top Overlay "NC1" at 1519.29,3410.32 h30 r90; Top Overlay "N01" at 1816.54,3410.32 h30 r90; Top Overlay "NO2" at 1816.54,3618.98 h30 r90; Top Overlay "NC2" at 1517.32,3618.98 h30 r90; Top Overlay "COM" at 1664.96,3516.61 h30 r90
U1: Top Overlay "GND" at 1518.27,2125 h40 r90; Top Overlay "Vout" at 1585,1995 h20; Top Overlay "TAB" at 1210,2110 h40 r90; Top Overlay "Vin" at 1585,2325 h20